# Altium PCB OMC_Unit_200316.PcbDoc
Units mil, origin at the board's own origin, x right, y up, seen from the top; angles counter-clockwise.
Board outline 4842.52 x 2755.91 mil, 2 copper layers (Top Layer, Bottom Layer); 77 components, 66 nets, 353 pads, 384 vias.
Unrouted connection lines stored in the file: 11.
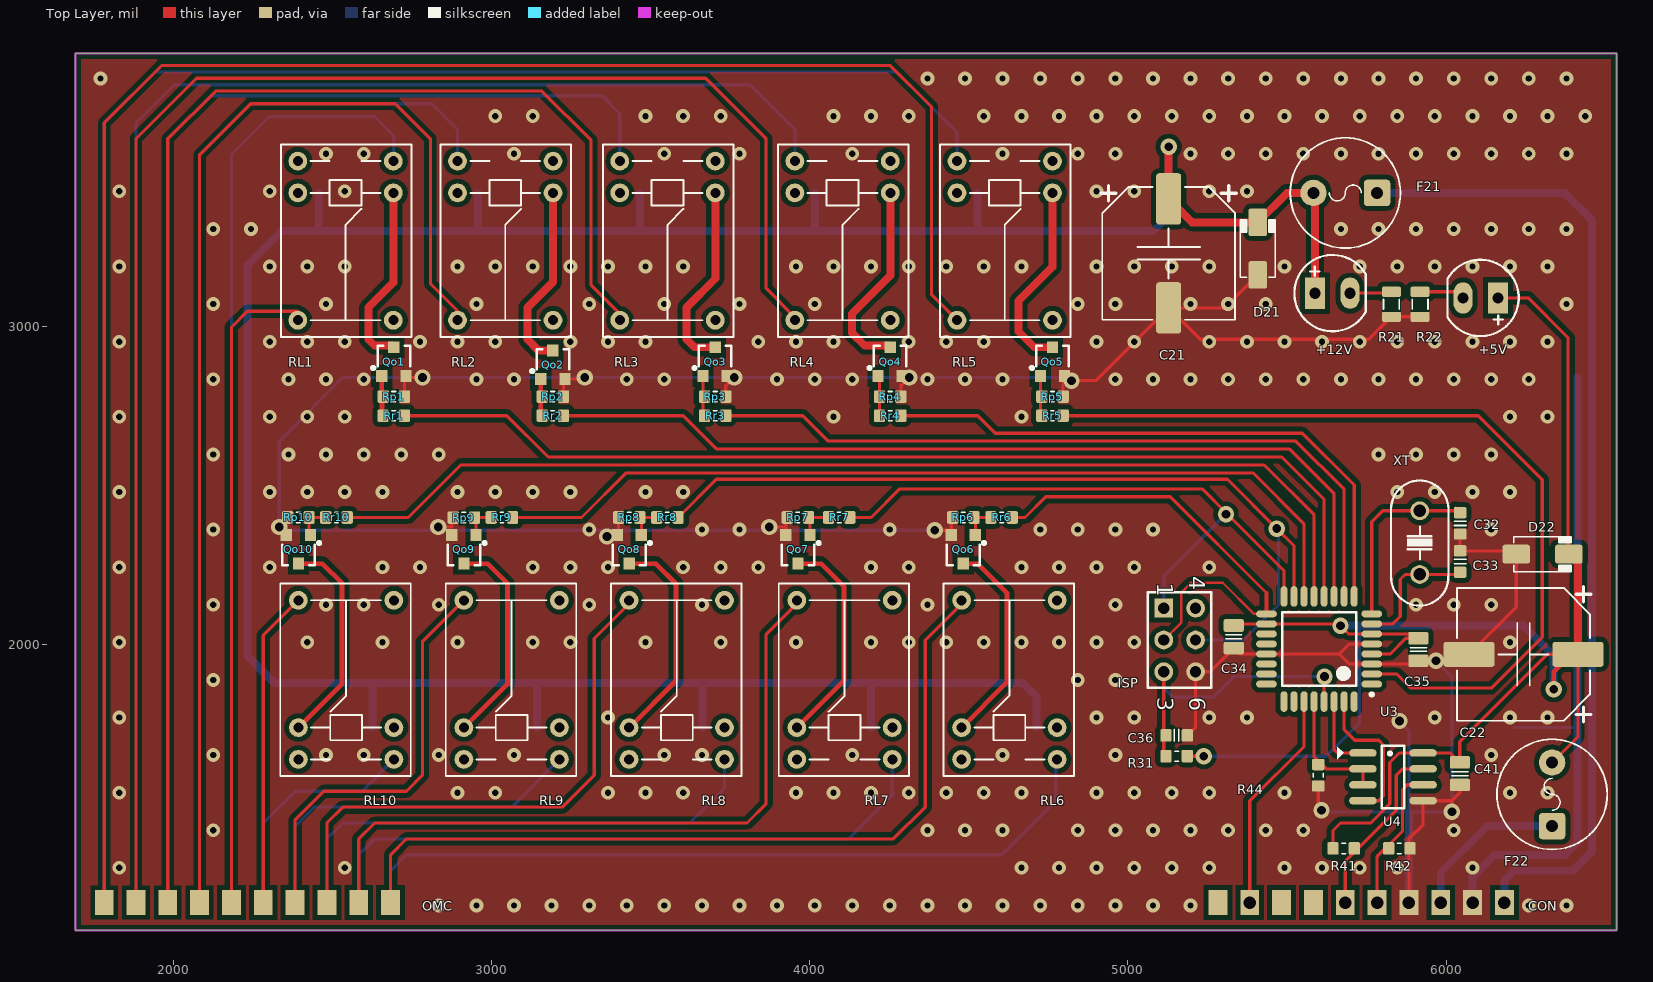
[diagram p0: Top Layer view]
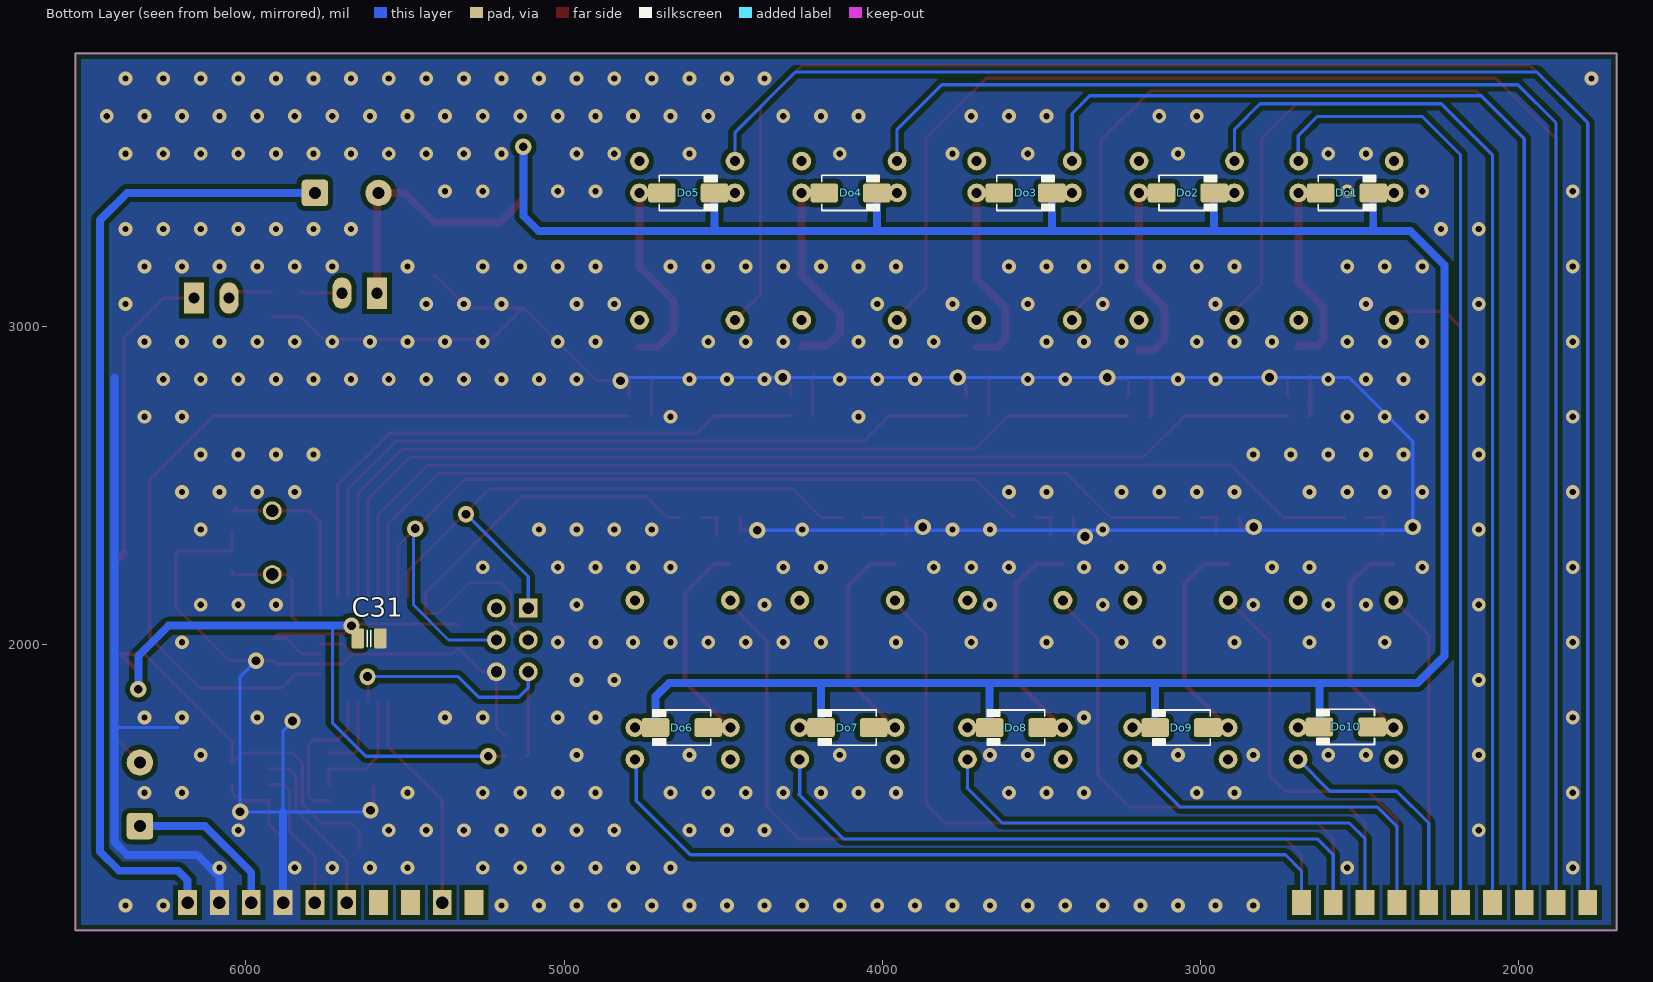
[diagram p1: Bottom Layer view, seen from below]
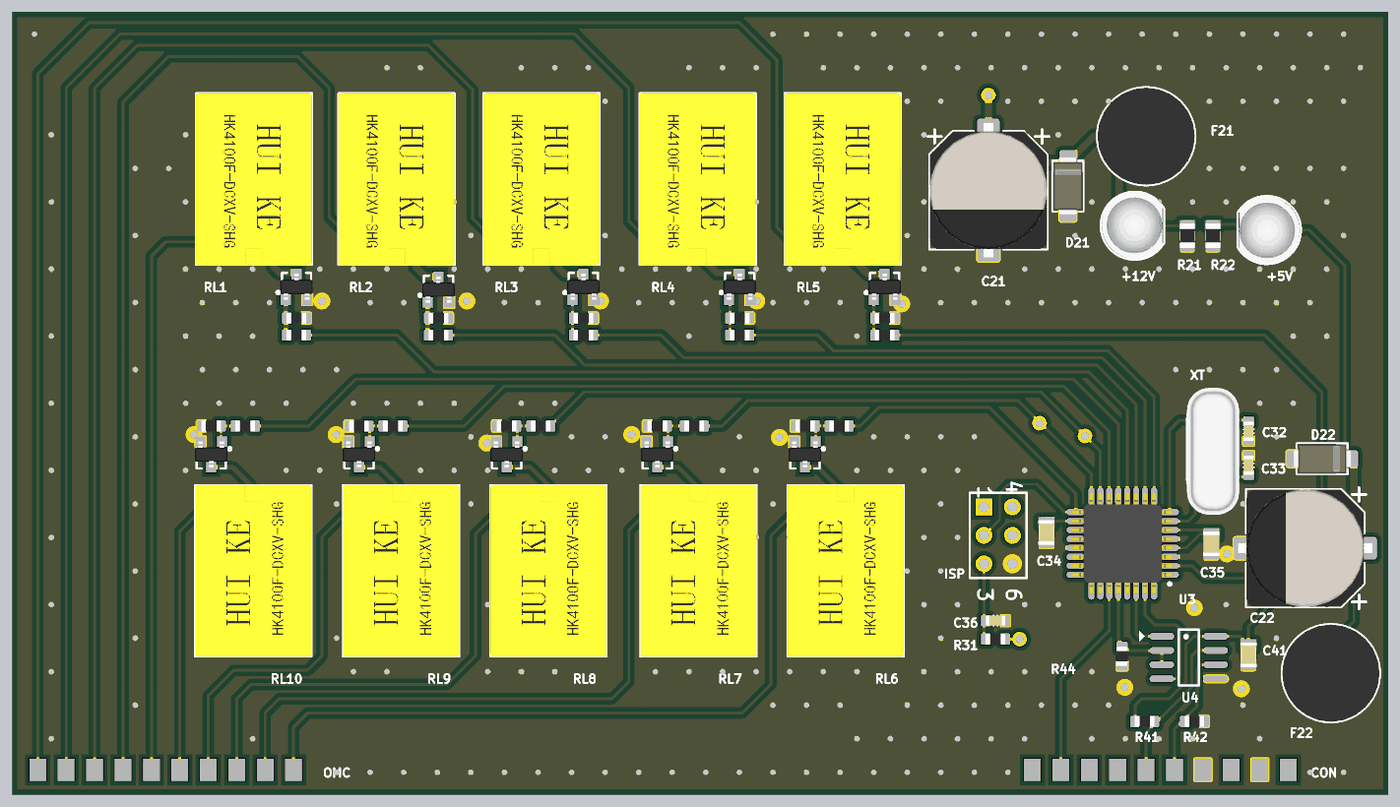
[diagram p2: 3D render of the assembled board from above, using the file's embedded part models]
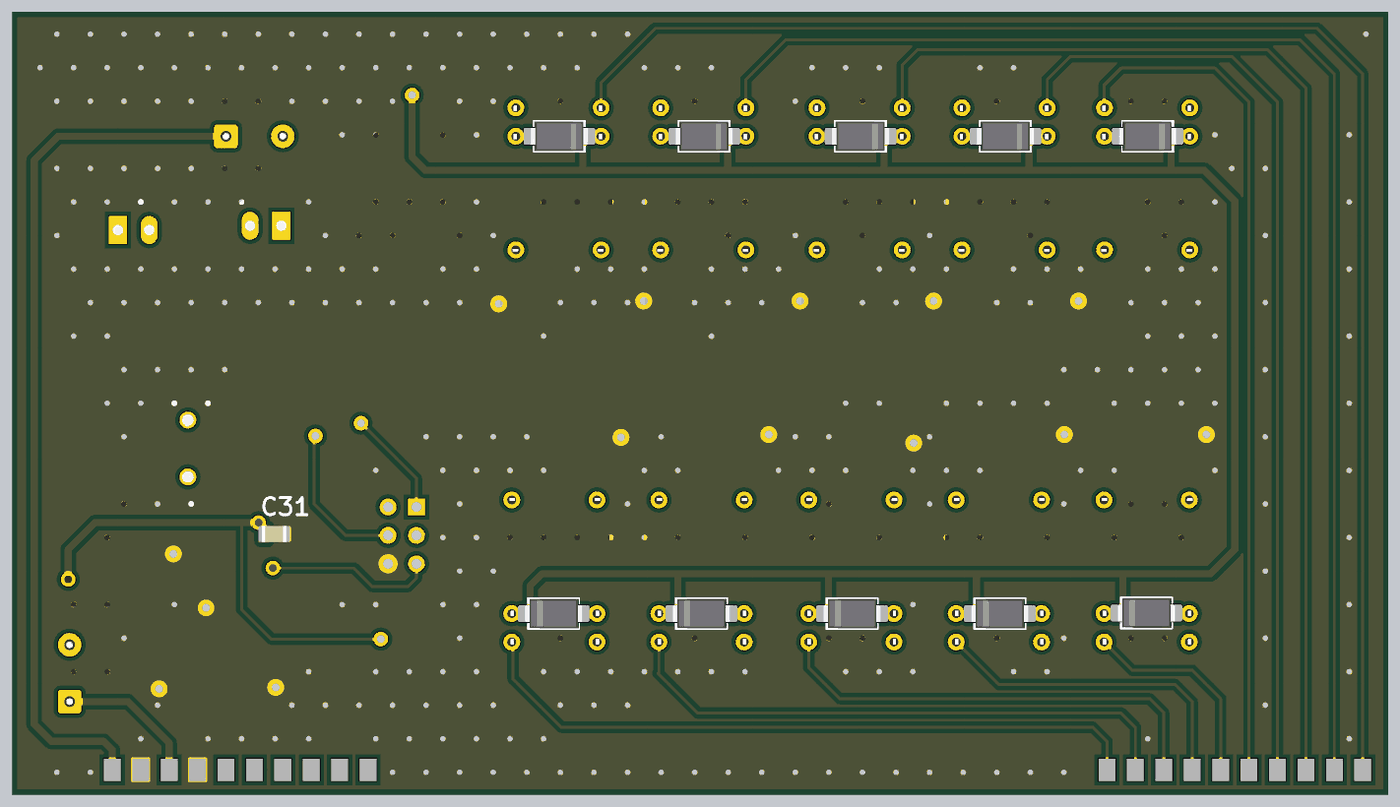
[diagram p3: 3D render of the assembled board from below, using the file's embedded part models]

## Layer stack, top to bottom
Top Solder: solder mask 0.4, Solder Resist, Dk 3.5
Top Layer: signal copper 1.4
Dielectric 1: dielectric 12.6, FR-4, Dk 4.8
Bottom Layer: signal copper 1.4
Bottom Solder: solder mask 0.4, Solder Resist, Dk 3.5

## Board outline
1692.91,1102.36 1692.91,3858.27 6535.43,3858.27 6535.43,1102.36

## Design rules (kind name [scope] priority, off if disabled: settings)
Clearance [All] p1: gap=15
PlaneConnect [All] p1: planeconnectstyle=Direct reliefexpansion=20 reliefentries=4 reliefconductorwidth=25 reliefairgap=10
PolygonConnect [All] p1: connectstyle=Direct reliefconductorwidth=25 reliefentries=4 polygonreliefangle="90 Angle" airgapwidth=10
RoutingVias [All] p1: holewidth=28 width=50 viastyle="Through Hole" minholewidth=23.62 minwidth=47.24 maxholewidth=196.85 maxwidth=196.85
SolderMaskExpansion [All] p1: expansion=4
Width [All] p1: maxlimit=118.11 minlimit=8 preferedwidth=10
29 further rules are at their usual default settings.

## Classes and differential pairs
component class OMC_Unit_200316: D12

## Components (designator, comment, footprint, x,y, rotation, side; value= is the part's Value field where it differs from the comment)
+5V "Led" "LED 5mm RED" 6108.07,3090.16 r180 top
+12V "Led" "LED 5mm RED" 5643.07,3105.16 r0 top
C21 "2200uF/35V" CAP_ELEC_SIZE_G 5128.07,3230.16 r180 top
C22 "2200uF/35V" CAP_ELEC_SIZE_G 6243.07,1970.16 r90 top
C31 "Cap" CAPC2012N_F#1 5613.07,2020.16 r180 bottom
C32 "CAP NP" CAPC1608N 6044.07,2381.91 r270 top
C33 "CAP NP" CAPC1608N 6044.07,2261.91 r90 top
C34 "Cap" CAPC2012N_F#2 5332.68,2025.32 r270 top
C35 "Cap" CAPC2012N_F#2 5912.68,1985.32 r270 top
C36 "CAP NP" CAPC1608N 5153.07,1715.16 r180 top
C41 "100nF/104" CAPC2012N_F#2 6043.07,1595.16 r90 top
CON "Header 10X2A" OMC10 5283.07,1190.16 r0 top
D21 "Diode" DO-214AC 5408.07,3245.16 r90 top
D22 "Diode" DO-214AC 6303.07,2285.16 r0 top
Do1 "M7" DO-214AC 2540,3420 r180 bottom
Do2 "M7" DO-214AC 3040,3420 r180 bottom
Do3 "M7" DO-214AC 3550,3420 r180 bottom
Do4 "M7" DO-214AC 4100,3420 r180 bottom
Do5 "M7" DO-214AC 4610,3420 r180 bottom
Do6 "M7" DO-214AC 4630,1740 r0 bottom
Do7 "M7" DO-214AC 4110,1740 r0 bottom
Do8 "M7" DO-214AC 3580,1740 r0 bottom
Do9 "M7" DO-214AC 3060,1740 r0 bottom
Do10 "M7" DO-214AC 2544,1742 r0 bottom
F21 "1.5A" FUSE_SR-5-BK 5683.07,3420.16 r180 top
F22 "1.5A" FUSE_SR-5-BK 6333.07,1530.16 r90 top
ISP "Header 3X2A" HDR2X3_CEN 5112.68,2115.32 r270 top
OMC "Header 10X2A" OMC10 1783.07,1190.16 r0 top
Qo1 "C828" "SOT23 TOP" 2693.46,2890.16 r0 top
Qo2 "C828" "SOT23 TOP" 3193.07,2880.16 r0 top
Qo3 "C828" "SOT23 TOP" 3703.07,2890.16 r0 top
Qo4 "C828" "SOT23 TOP" 4253.07,2890.16 r0 top
Qo5 "C828" "SOT23 TOP" 4763.07,2890.16 r0 top
Qo6 "C828" "SOT23 TOP" 4482.68,2300 r180 top
Qo7 "C828" "SOT23 TOP" 3963.07,2300 r180 top
Qo8 "C828" "SOT23 TOP" 3433.07,2300 r180 top
Qo9 "C828" "SOT23 TOP" 2913.46,2300 r180 top
Qo10 "C828" "SOT23 TOP" 2393.46,2300 r180 top
R21 "Res_0805_1k" RESC2012N_F 5828.07,3070.16 r270 top
R22 "Res_0805_1k" RESC2012N_F 5918.07,3070.16 r270 top
R31 "Res" RESC1608N_ZERO 5153.07,1650.16 r0 top
R41 "1k" RESC1608N_ZERO 5678.07,1360.16 r180 top
R42 "1k" RESC1608N_ZERO 5853.07,1360.16 r180 top
R44 "330R" RESC1608N_ZERO 5598.07,1590.16 r90 top
RL1 "HK4100F" HK4100F 2691.65,3020.16 r90 top
RL2 "HK4100F" HK4100F 3193.46,3020.16 r90 top
RL3 "HK4100F" HK4100F 3703.46,3020.16 r90 top
RL4 "HK4100F" HK4100F 4253.46,3020.16 r90 top
RL5 "HK4100F" HK4100F 4763.07,3020.16 r90 top
RL6 "HK4100F" HK4100F 4477.55,2140 r270 top
RL7 "HK4100F" HK4100F 3959.68,2140 r270 top
RL8 "HK4100F" HK4100F 3432.44,2140 r270 top
RL9 "HK4100F" HK4100F 2913.46,2140 r270 top
RL10 "HK4100F" HK4100F 2393.46,2140 r270 top
Rp1 "Res" RESC1608N_ZERO 2693.46,2780.16 r180 top
Rp2 "Res" RESC1608N_ZERO 3193.07,2780.16 r180 top
Rp3 "Res" RESC1608N_ZERO 3703.07,2780.16 r180 top
Rp4 "Res" RESC1608N_ZERO 4253.07,2780.16 r180 top
Rp5 "Res" RESC1608N_ZERO 4763.07,2780.16 r180 top
Rp6 "Res" RESC1608N_ZERO 4483.07,2400.16 r0 top
Rp7 "Res" RESC1608N_ZERO 3963.07,2400.16 r0 top
Rp8 "Res" RESC1608N_ZERO 3433.07,2400.16 r0 top
Rp9 "Res" RESC1608N_ZERO 2913.46,2400 r0 top
Rp10 "Res" RESC1608N_ZERO 2393.46,2400.16 r0 top
Rr1 "Res" RESC1608N_ZERO 2693.07,2720.16 r180 top
Rr2 "Res" RESC1608N_ZERO 3193.07,2720.16 r180 top
Rr3 "Res" RESC1608N_ZERO 3703.07,2720.16 r180 top
Rr4 "Res" RESC1608N_ZERO 4253.07,2720.16 r180 top
Rr5 "Res" RESC1608N_ZERO 4763.07,2720.16 r180 top
Rr6 "Res" RESC1608N_ZERO 4603.07,2400.16 r180 top
Rr7 "Res" RESC1608N_ZERO 4093.07,2400.16 r180 top
Rr8 "Res" RESC1608N_ZERO 3553.07,2400.16 r180 top
Rr9 "Res" RESC1608N_ZERO 3033.07,2400.16 r180 top
Rr10 "Res" RESC1608N_ZERO 2513.07,2400.16 r180 top
U3 "ATmega88PA" 32PIN 5600.79,1986.97 r180 top
U4 "MAX485" SO-8 5833.07,1585.16 r0 top
XT "20MHz" XT2 5917.07,2321.16 r90 top

## Footprints (in the part's own frame and the unit in brackets; to place one, negate y for a bottom-side part, rotate by r counter-clockwise, add the part's x,y. Pads: shape width x height; smd on the part's side, far side on the other; paste and mask are expansions set on the pad)
32PIN [mm]
  oval 1.65x0.55 smd: 1(-4.2,2.8) 2(-4.2,2) 3(-4.2,1.2) 4(-4.2,0.4) 5(-4.2,-0.4) 6(-4.2,-1.2) 7(-4.2,-2) 8(-4.2,-2.8) 17(4.2,-2.8) 18(4.2,-2) 19(4.2,-1.2) 20(4.2,-0.4) 21(4.2,0.4) 22(4.2,1.2) 23(4.2,2) 24(4.2,2.8)
  oval 0.55x1.65 smd: 9(-2.8,-4.2) 10(-2,-4.2) 11(-1.2,-4.2) 12(-0.4,-4.2) 13(0.4,-4.2) 14(1.2,-4.2) 15(2,-4.2) 16(2.8,-4.2) 25(2.8,4.2) 26(2,4.2) 27(1.2,4.2) 28(0.4,4.2) 29(-0.4,4.2) 30(-1.2,4.2) 31(-2,4.2) 32(-2.8,4.2)
  silkscreen extent -4.33,-2.95 2.95,3.75, body extent -4.5,-4.5 4.5,4.5, height 1.6
CAP_ELEC_SIZE_G [mm] "Capacitor, polarized, aluminum can; 10.0x10.2mm DxH"
  round 0.635 on Mech14: 0(0,0)
  rrect25% 2x4.1 smd: 1(0,-4.35) 2(0,4.35)
  silkscreen extent -5.4,-5.4 5.4,5.3, body extent -5.25,-6 5.25,6, height 10.5
CAPC1608N [mm] "Chip Capacitor, Body 1.6x0.8mm, 0603, IPC Medium Density"
  round 0.254 on Mech14: 0(0,0)
  rrect25% 0.9x1 smd: 1(-0.85,0) 2(0.85,0)
  Top Layer pour cut-out: -0.4,0.6 0.4,0.6 0.4,-0.6 -0.4,-0.6
  silkscreen extent -0.18,-0.48 0.18,0.48, body extent -0.85,-0.45 0.85,0.45, height 0.89
CAPC2012N_F#1 [mm] "Chip Capacitor, Body 2.0x1.2mm, 0805, IPC Medium Density, for Flex circuits"
  round 0.254 on Mech14: 0(0,0)
  rrect25% 1.2x1.4 on Bottom Solder: 1(-0.9,0) 1(0.9,0)
  rrect25% 1x1.6 smd paste-1: 1(-0.9,0) 2(0.9,0)
  rrect25% 1x1.4 on Bottom Paste: 1(-0.9,0) 1(0.9,0)
  Top Layer pour cut-out: -0.4,0.8 0.4,0.8 0.4,-0.8 -0.4,-0.8
  silkscreen extent -0.15,-0.65 0.15,0.65, body extent -1.1,-0.72 1.1,0.73, height 1.34
CAPC2012N_F#2 [mm] "Chip Capacitor, Body 2.0x1.2mm, 0805, IPC Medium Density, for Flex circuits"
  round 0.254 on Mech14: 0(0,0)
  rrect25% 1.2x1.4 on Top Solder: 1(-0.9,0) 1(0.9,0)
  rrect25% 1x1.6 smd paste-1: 1(-0.9,0) 2(0.9,0)
  rrect25% 1x1.4 on Top Paste: 1(-0.9,0) 1(0.9,0)
  Top Layer pour cut-out: -0.4,0.8 0.4,0.8 0.4,-0.8 -0.4,-0.8
  silkscreen extent -0.15,-0.65 0.15,0.65, body extent -1.1,-0.72 1.1,0.73, height 1.34
DO-214AC [mm] "JEDEC DO214 variation AC. SMA"
  round 0.508 on Mech14: 0(0,0)
  rrect25% 2.2x1.5 smd: A(-2.1,0) K(2.1,0)
  silkscreen extent -2.3,-1.4 2.3,1.4, body extent -2.6,-1.3 2.6,1.3, height 2.42
FUSE_SR-5-BK [mm]
  round 0.5 on Mech14: 0(0,0)
  rrect25% 2.1x2.1 hole 0.965: 1(-2.54,0)
  round 2.1 hole 0.965: 2(2.54,0)
  silkscreen extent -4.4,-4.4 4.4,4.4, body extent -4.35,-4.32 4.35,4.32, height 8.29
HDR2X3_CEN [mm] "Connector; Header; 3x2 Position"
  rect 1.5x1.5 hole 0.9: 1(0,0)
  round 1.5 hole 0.9: 2(2.54,0) 3(5.08,0) 4(0,2.54) 5(2.54,2.54) 6(5.08,2.54)
  silkscreen extent -1.27,-1.27 6.35,3.81
HK4100F [mm] "Relay 6 pin"
  round 1.5 hole 0.8: 1(0,7.62) 2(0,0) 3(10.16,7.62) 4(10.16,0) 5(12.7,7.62) 6(12.7,0)
  silkscreen extent -1.35,-1.45 14.02,8.97, body extent -1.38,-1.43 14.02,8.97, height 11.82
"LED 5mm RED" [mm]
  rect 1.6x2.5 hole 0.9: A(-1.397,0)
  oval 1.5x2.5 hole 0.9: K(1.397,0)
  silkscreen extent -3.04,-3.05 2.64,3.04, body extent -2.94,-2.97 2.48,3.05, height 12.31
OMC10 [mm]
  rect 1.5x2 smd: 1(0,0) 2(2.54,0) 3(5.08,0) 4(7.62,0) 5(10.16,0) 6(12.7,0) 7(15.24,0) 8(17.78,0) 9(20.32,0) 10(22.86,0)
  rect 1.5x2 smd far side: 11(0,0) 12(2.54,0) 13(5.08,0) 14(7.62,0) 15(10.16,0) 16(12.7,0) 17(15.24,0) 18(17.78,0) 19(20.32,0) 20(22.86,0)
RESC1608N_ZERO [mm] "Chip Resistor, Body 1.6x0.8mm, 0603, IPC Medium Density"
  round 0.254 on Mech14: 0(0,0)
  rrect25% 0.9x1 smd: 1(-0.85,0) 2(0.85,0)
  Top Layer pour cut-out: -0.4,0.6 0.4,0.6 0.4,-0.6 -0.4,-0.6
  silkscreen extent -0.15,-0.41 0.15,0.41, body extent -0.87,-0.47 0.88,0.48, height 0.54
RESC2012N_F [mm] "Chip Resistor, Body 2.0x1.2mm, 0805, IPC Medium Density"
  round 0.254 on Mech14: 0(0,0)
  rrect25% 1x1.3 on Top Solder: 1(-1,0) 1(1,0)
  rrect25% 0.8x1.5 smd paste-1: 1(-1,0) 2(1,0)
  rrect25% 0.8x1.3 on Top Paste: 1(-1,0) 1(1,0)
  Top Layer pour cut-out: -0.6,0.75 0.6,0.75 0.6,-0.75 -0.6,-0.75
  silkscreen extent -0.38,-0.64 0.38,0.64, body extent -1.1,-0.67 1.1,0.68, height 0.69
SO-8 [mm] "8-Pin Small Outline Integrated Circuit 1.27 mm Pitch, IPC Medium Density"
  oval 2.2x0.6 smd: 1(-2.4,1.905) 2(-2.4,0.635) 3(-2.4,-0.635) 4(-2.4,-1.905) 5(2.4,-1.905) 6(2.4,-0.635) 7(2.4,0.635) 8(2.4,1.905)
  silkscreen extent -4.44,-2.5 0.9,2.5, body extent -1.95,-2.45 1.95,2.45, height 1.75
"SOT23 TOP" [mm]
  rect 0.9x0.95 smd: 1(-0.965,-1.143) 2(0,1.143) 3(0.965,-1.143)
  silkscreen extent -1.77,-0.63 1.3,1.25, body extent -1.46,-1.17 1.46,1.17, height 1
XT2 [mm]
  round 1.5 hole 1: 1(-2.54,0) 2(2.54,0)
  silkscreen extent -5.03,-2.29 4.96,2.29, body extent -5.93,-2.36 5.42,2.29, height 3.5

## Part data
C21 C22: library part CP4, "Cap 1000uF/16V - 220uF/50V"
C41: library part "CAP NP"
CON OMC: "Header, 10-Pin, Dual row"
Do1 Do2 Do3 Do4 Do5 Do6 Do7 Do8 Do9 Do10: library part Diode
F21 F22: library part Fuse
ISP: "Header, 3-Pin, Dual row"
Qo1 Qo2 Qo3 Qo4 Qo5 Qo6 Qo7 Qo8 Qo9 Qo10: library part NPN, "Transistor C828 C1815...."
R21 R22: library part Res
R41 R42 R44: library part Res, "Tro dan"
U3: library part ATmega48/168/328, "ATmega48/168/328"
U4: "RS232 - RS485 (Same sn75176)"
XT: library part Crystal

## Via types
v1: diameter 43.31, hole 19.68, Top Layer to Bottom Layer, tented both sides, 356 vias
v2: diameter 51.18, hole 27.56, Top Layer to Bottom Layer, 20 vias
v3: diameter 59.06, hole 39.37, Top Layer to Bottom Layer, 7 vias
v4: diameter 50, hole 28, Top Layer to Bottom Layer, 1 vias

## Nets (pads, with @x,y where several pads share a name; then routed paths per layer and width w, separated by ;. In a path a pad name is that pad's centre, name@x,y a point inside that pad or via, vN(x,y) a via of type N, cw(c..) or ccw(c..) an arc to the next point about the centre after c; other vN are vias at no path point)
+5V_IN: CON.8 CON.18 F22.1 | length 505.1
  Bottom Layer w25: v3(5983.07,1190.16) 5983.07,1285.16 6128.07,1430.16 F22.1
+12V: +12V.A C21.1 D21.K Do1.K Do2.K Do3.K Do4.K Do5.K Do6.K Do7.K Do8.K Do9.K Do10.K F21.2 RL1.3 RL2.3 RL3.3 RL4.3 RL5.3 RL6.3 RL7.3 RL8.3 RL9.3 RL10.3 | length 9212.4
  Top Layer w25: RL4.3@3953.46,3430 RL4.3@3958.39,3425.08 ; v2(5128.07,3565.16) C21.1 5201.65,3327.83 D21.K 5500.39,3420.16 F21.2 5588.07,3415.16 +12V.A
  Bottom Layer w25: 2457.32,3302.68 Do1.K ; Do10.K 2626.68,1873.48 ; 2957.32,3302.68 Do2.K ; Do9.K 3142.68,1877.48 ; RL3.3@3388.07,3420.16 RL3.3 ; 3467.32,3302.68 Do3.K ; Do8.K 3662.68,1877.48 ; RL8.3@3732.44,1729.37 RL8.3 ; RL4.3@3953.46,3410.55 RL4.3 ; 4017.32,3302.68 Do4.K ; Do7.K 4192.68,1877.48 ; RL7.3@4259.68,1729.37 RL7.3 ; 4527.32,3312.68 Do5.K ; Do6.K 4712.68,1837.32 4669.84,1880.16 2318.07,1880.16 2233.07,1965.16 2233.07,3193.07 2340,3300 5080,3300 5128.07,3348.07 v2(5128.07,3565.16)
+12V_IN: CON.10 CON.20 F21.1 | length 3077.5
  Bottom Layer w25: F21.1 6373.07,3420.16 6458.07,3335.16 6458.07,1350.16 6398.07,1290.16 6213.07,1290.16 6183.07,1260.16 v3(6183.07,1190.16)
COM1: OMC.5 RL1.1 RL1.2 | length 2037.6
  Top Layer w10: OMC.5 2183.07,2998.5 2233.07,3048.5 RL1.1@2391.65,3048.5
COM2: OMC.4 RL2.1 RL2.2 | length 3762.4
  Top Layer w10: OMC.4 2083.07,3540.16 2243.07,3700.16 2698.07,3700.16 2808.07,3590.16 2808.07,3135.39 2893.46,3050
COM3: OMC.3 RL3.1 RL3.2 | length 4438.9
  Top Layer w10: OMC.3 1983.07,3590.16 2133.07,3740.16 3158.07,3740.16 3313.07,3585.16 3313.07,3130.39 RL3.1@3403.46,3040
COM4: OMC.2 RL4.1 RL4.2 | length 5135
  Top Layer w10: OMC.2 1883.07,3590.16 2073.07,3780.16 3673.07,3780.16 3863.07,3590.16 3863.07,3120.39 RL4.1@3953.46,3030
COM5: OMC.1 RL5.1 RL5.2 | length 5881.9
  Top Layer w10: OMC.1 1783.07,3640.16 1963.07,3820.16 4253.07,3820.16 4383.07,3690.16 4383.07,3100.39 RL5.1@4463.46,3020
COM6: OMC.10 RL6.1 RL6.2 | length 2588.8
  Top Layer w10: OMC.10@2683.07,1180.16 OMC.10 2683.07,1340.16 2733.07,1390.16 4263.07,1390.16 4363.07,1490.16 4363.07,2014.89 RL6.2@4477.55,2129.37
COM7: OMC.9 RL7.1 RL7.2 | length 2204.8
  Top Layer w10: OMC.9@2583.07,1180.16 OMC.9 2583.07,1390.16 2633.07,1440.16 3803.07,1440.16 3863.07,1500.16 3863.07,2032.76 RL7.2@3959.68,2129.37
COM8: OMC.8 RL8.1 RL8.2 | length 1746.6
  Top Layer w10: OMC.8@2483.07,1180.16 OMC.8 2483.07,1440.16 2533.07,1490.16 3223.07,1490.16 3323.07,1590.16 3323.07,2020 RL8.2@3432.44,2129.37
COM9: OMC.7 RL9.1 RL9.2 | length 1331.8
  Top Layer w10: OMC.7@2383.07,1180.16 OMC.7 2383.07,1450.16 2473.07,1540.16 2733.07,1540.16 2783.07,1590.16 2783.07,2009.61 RL9.2
COM10: OMC.6 RL10.1 RL10.2 | length 1030
  Top Layer w10: OMC.6@2283.07,1180.16 OMC.6 2283.07,2029.61 RL10.2 RL10.2@2393.46,2115.55
GND: C21.2 C22.2 C31.2 C32.2 C33.2 C34.2 C35.2 C36.1 C41.1@6043.07,1559.72 CON.7 CON.9 CON.17 CON.19 D21.A D22.A ISP.6 Qo1.3 Qo2.3 Qo3.3 Qo4.3 Qo5.3 Qo6.3 Qo7.3 Qo8.3 Qo9.3 Qo10.3 R21.2 R22.2 R42.1 R44.1 Rp1.1 Rp2.1 Rp3.1 Rp4.1 Rp5.1 Rp6.1 Rp7.1 Rp8.1 Rp9.1 Rp10.1 U3.3 U3.5 U3.21 U4.5 | length 13356.5
  Top Layer w10: Rp1.1 Qo1.3@2726.93,2840.16 ; Qo1.3@2726.93,2846.3 Qo1.3@2726.93,2840.16 ; v2(2783.07,2840.16) Qo1.3@2726.93,2840.16 ; v2(2833.07,2370.16) v2(2833.07,2370.16) 2875.46,2370.23 2875.46,2395.46 Rp9.1 ; Rp2.1 3226.54,2830.62 Qo2.3 3288.07,2835.16 v2(3293.07,2840.16) ; Qo8.3 3399.61,2349.54 Rp8.1 ; Rp3.1 3736.54,2813.62 v2(3763.07,2840.16) ; v2(3873.07,2370.16) 3873.22,2370.31 3925.07,2370.31 ; Qo7.3 3925.07,2370.31 ; Rp7.1 3925.07,2395.62 3925.07,2370.31 ; Rp4.1 4286.54,2813.62 v2(4313.07,2840.16) ; v2(4393.07,2360.16) 4439.75,2360.16 4444.68,2355.23 4444.68,2395.23 Rp6.1 ; Rp5.1 4796.54,2840.62 Qo5.3 ; v2(4823.07,2830.16) 4899.33,2830.16 C21.2 ; C36.1 5212.68,1741.3 ISP.6 5258.11,1915.32 C34.2 5351.34,1971.22 U3.21 5664.13,1971.22 ; D21.A 5304.49,3058.9 C21.2 ; R44.1 5598.07,1490.16 v2(5608.07,1480.16) ; U3.5 5695.63,2002.72 5664.13,1971.22 ; v3(5883.07,1190.16) 5883.07,1390.16 5927.56,1434.65 U4.5 6018.07,1510.16 ; R22.2 R21.2 5757.44,2960.16 5226.81,2960.16 C21.2 ; v2(6018.07,1475.16) 6018.07,1510.16 ; C41.1@6043.07,1559.72 6043.07,1535.16 6018.07,1510.16 ; C32.2 C33.2 6210.18,2295.37 D22.A 6220.39,2118.74 C22.2 6051.54,1949.88 v2(5968.07,1949.88) C35.2 5902.52,1939.72 U3.3 5695.63,1939.72 5664.13,1971.22
  Bottom Layer w10: v2(4393.07,2360.16) 3363.07,2360.16 2343.07,2360.16 v2(2333.07,2370.16) 2333.07,2640.16 2533.07,2840.16 v2(2783.07,2840.16) 3070.87,2840.16 v2(3293.07,2840.16) v2(3763.07,2840.16) v2(4313.07,2840.16) 4813.07,2840.16 v2(4823.07,2830.16) ; v2(5608.07,1480.16) 5613.07,1475.16 5883.07,1475.16 ; v4(5853.07,1760.16) 5883.07,1730.16 5883.07,1475.16 ; v2(5968.07,1949.88) 6018.07,1899.88 v2(6018.07,1475.16) 5883.07,1475.16 ; 6213.07,1740.16 6413.07,1740.16
  Bottom Layer w25: v3(5883.07,1190.16) 5883.07,1475.16 ; v3(6083.07,1190.16) 6083.07,1270.16 6153.07,1340.16 6373.07,1340.16 6413.07,1380.16 6413.07,1740.16 6413.07,2840.16
  other v1: 2834.64,1181.1 2952.76,1181.1 3070.87,1181.1 3188.98,1181.1 3307.09,1181.1 3425.2,1181.1 3543.31,1181.1 3661.42,1181.1 3779.53,1181.1 3897.64,1181.1 4015.75,1181.1 4133.86,1181.1 4251.97,1181.1 4370.08,1181.1 4488.19,1181.1 4606.3,1181.1 4724.41,1181.1 4842.52,1181.1 4960.63,1181.1 5078.74,1181.1 5196.85,1181.1 6259.84,1181.1 6377.95,1181.1 1830.71,1299.21 2539.37,1299.21 4665.35,1299.21 4783.46,1299.21 4901.57,1299.21 5019.68,1299.21 5137.79,1299.21 5255.9,1299.21 5492.12,1299.21 5610.23,1299.21 5728.34,1299.21 5846.45,1299.21 6082.68,1299.21 2125.98,1417.32 4370.08,1417.32 4488.19,1417.32 4606.3,1417.32 4842.52,1417.32 4960.63,1417.32 5078.74,1417.32 5196.85,1417.32 5314.96,1417.32 5433.07,1417.32 5551.18,1417.32 6023.62,1417.32 1830.71,1535.43 2893.7,1535.43 3011.81,1535.43 3366.14,1535.43 3484.25,1535.43 3602.36,1535.43 3956.69,1535.43 4074.8,1535.43 4192.91,1535.43 4311.02,1535.43 4429.13,1535.43 4547.24,1535.43 4665.35,1535.43 4901.57,1535.43 5019.68,1535.43 5137.79,1535.43 5255.9,1535.43 5492.12,1535.43 6200.79,1535.43 6318.9,1535.43 2125.98,1653.54 2480.31,1653.54 2598.42,1653.54 2834.64,1653.54 3070.87,1653.54 3543.31,1653.54 3661.42,1653.54 4133.86,1653.54 4606.3,1653.54 4960.63,1653.54 6141.73,1653.54 1830.71,1771.65 3366.14,1771.65 4901.57,1771.65 5019.68,1771.65 5255.9,1771.65 5374.01,1771.65 5964.57,1771.65 6200.79,1771.65 6318.9,1771.65 2125.98,1889.76 4842.52,1889.76 4960.63,1889.76 1830.71,2007.87 2421.26,2007.87 2657.48,2007.87 2893.7,2007.87 3129.92,2007.87 3248.03,2007.87 3484.25,2007.87 3720.47,2007.87 3956.69,2007.87 4192.91,2007.87 4311.02,2007.87 4429.13,2007.87 4547.24,2007.87 4665.35,2007.87 4783.46,2007.87 4901.57,2007.87 5019.68,2007.87 6200.79,2007.87 2125.98,2125.98 2480.31,2125.98 2598.42,2125.98 2834.64,2125.98 3307.09,2125.98 3661.42,2125.98 4370.08,2125.98 4960.63,2125.98 5905.51,2125.98 6023.62,2125.98 6141.73,2125.98 1830.71,2244.09 2303.15,2244.09 2657.48,2244.09 2775.59,2244.09 3129.92,2244.09 3248.03,2244.09 3366.14,2244.09 3602.36,2244.09 3720.47,2244.09 3838.58,2244.09 4192.91,2244.09 4311.02,2244.09 4665.35,2244.09 4783.46,2244.09 4901.57,2244.09 5019.68,2244.09 5255.9,2244.09 2125.98,2362.2 3307.09,2362.2 3661.42,2362.2 3779.53,2362.2 4251.97,2362.2 4724.41,2362.2 4842.52,2362.2 4960.63,2362.2 5078.74,2362.2 6141.73,2362.2 1830.71,2480.31 2303.15,2480.31 2421.26,2480.31 2539.37,2480.31 2657.48,2480.31 2893.7,2480.31 3011.81,2480.31 3129.92,2480.31 3248.03,2480.31 3484.25,2480.31 3602.36,2480.31 5846.45,2480.31 5964.57,2480.31 6082.68,2480.31 6200.79,2480.31 2125.98,2598.42 2362.2,2598.42 2480.31,2598.42 2598.42,2598.42 2716.53,2598.42 2834.64,2598.42 5787.4,2598.42 5905.51,2598.42 6023.62,2598.42 6141.73,2598.42 1830.71,2716.53 2303.15,2716.53 2421.26,2716.53 2539.37,2716.53 4074.8,2716.53 4665.35,2716.53 6200.79,2716.53 6318.9,2716.53 2125.98,2834.64 2362.2,2834.64 2480.31,2834.64 2598.42,2834.64 2952.76,2834.64 3070.87,2834.64 3425.2,2834.64 3543.31,2834.64 3897.64,2834.64 4015.75,2834.64 4133.86,2834.64 4370.08,2834.64 4488.19,2834.64 4606.3,2834.64 4960.63,2834.64 5078.74,2834.64 5196.85,2834.64 5314.96,2834.64 5433.07,2834.64 5551.18,2834.64 5669.29,2834.64 5787.4,2834.64 5905.51,2834.64 6023.62,2834.64 6141.73,2834.64 6259.84,2834.64 1830.71,2952.76 2303.15,2952.76 2421.26,2952.76 2539.37,2952.76 2775.59,2952.76 2893.7,2952.76 3011.81,2952.76 3248.03,2952.76 3366.14,2952.76 3484.25,2952.76 3838.58,2952.76 3956.69,2952.76 4074.8,2952.76 4311.02,2952.76 4429.13,2952.76 4547.24,2952.76 4901.57,2952.76 5019.68,2952.76 5255.9,2952.76 5374.01,2952.76 5492.12,2952.76 5610.23,2952.76 5728.34,2952.76 5846.45,2952.76 5964.57,2952.76 6082.68,2952.76 6200.79,2952.76 6318.9,2952.76 2125.98,3070.87 2480.31,3070.87 2952.76,3070.87 3307.09,3070.87 3543.31,3070.87 3779.53,3070.87 4015.75,3070.87 4842.52,3070.87 4960.63,3070.87 5196.85,3070.87 5314.96,3070.87 5433.07,3070.87 6377.95,3070.87 1830.71,3188.98 2303.15,3188.98 2421.26,3188.98 2539.37,3188.98 2893.7,3188.98 3011.81,3188.98 3129.92,3188.98 3248.03,3188.98 3366.14,3188.98 3484.25,3188.98 3602.36,3188.98 3956.69,3188.98 4074.8,3188.98 4192.91,3188.98 4311.02,3188.98 4429.13,3188.98 4547.24,3188.98 4665.35,3188.98 4901.57,3188.98 5019.68,3188.98 5137.79,3188.98 5255.9,3188.98 5492.12,3188.98 5728.34,3188.98 5846.45,3188.98 5964.57,3188.98 6082.68,3188.98 6200.79,3188.98 6318.9,3188.98 2125.98,3307.09 2244.09,3307.09 5669.29,3307.09 5787.4,3307.09 5905.51,3307.09 6023.62,3307.09 6141.73,3307.09 6259.84,3307.09 6377.95,3307.09 1830.71,3425.2 2303.15,3425.2 2539.37,3425.2 4901.57,3425.2 5019.68,3425.2 5255.9,3425.2 5374.01,3425.2 2480.31,3543.31 2598.42,3543.31 3070.87,3543.31 3543.31,3543.31 3779.53,3543.31 4133.86,3543.31 4606.3,3543.31 4842.52,3543.31 4960.63,3543.31 5196.85,3543.31 5314.96,3543.31 5433.07,3543.31 5551.18,3543.31 5669.29,3543.31 5787.4,3543.31 5905.51,3543.31 6023.62,3543.31 6141.73,3543.31 6259.84,3543.31 6377.95,3543.31 3011.81,3661.42 3129.92,3661.42 3484.25,3661.42 3602.36,3661.42 3720.47,3661.42 4074.8,3661.42 4192.91,3661.42 4311.02,3661.42 4547.24,3661.42 4665.35,3661.42 4783.46,3661.42 4901.57,3661.42 5019.68,3661.42 5137.79,3661.42 5255.9,3661.42 5374.01,3661.42 5492.12,3661.42 5610.23,3661.42 5728.34,3661.42 5846.45,3661.42 5964.57,3661.42 6082.68,3661.42 6200.79,3661.42 6318.9,3661.42 6437.01,3661.42 1771.65,3779.53 4370.08,3779.53 4488.19,3779.53 4606.3,3779.53 4724.41,3779.53 4842.52,3779.53 4960.63,3779.53 5078.74,3779.53 5196.85,3779.53 5314.96,3779.53 5433.07,3779.53 5551.18,3779.53 5669.29,3779.53 5787.4,3779.53 5905.51,3779.53 6023.62,3779.53 6141.73,3779.53 6259.84,3779.53 6377.95,3779.53
  other v2: 3363.07,2340.16
IDC: CON.2 CON.12 U3.27 | length 702.1
  Top Layer w10: v3(5383.07,1190.16) 5383.07,1510.16 5553.54,1680.63 U3.27
MCU_RX: U3.30 U4.1 | length 246
  Top Layer w10: U3.30 5648.03,1670.47 5658.35,1660.16 U4.1
MCU_TX: U3.31 U4.4 | length 462.3
  Top Layer w10: U3.31 5679.53,1733.7 5713.07,1700.16 5788.07,1700.16 5803.07,1685.16 5803.07,1525.16 5788.07,1510.16 U4.4
MISO: ISP.1 Rr7.1 U3.16 | length 1967.6
  Top Layer w10: Rr7.1 4193.07,2400.16 4283.07,2490.16 5233.07,2490.16 v2@5310.57,2412.66 ; v2(5308.07,2410.16) v2@5310.57,2412.66 ; U3.16 5490.55,2232.68 v2@5310.57,2412.66
  Bottom Layer w10: ISP.1 5112.68,2214.76 v2(5308.07,2410.16)
MOSI: ISP.5 Rr8.1 U3.15 | length 2778.6
  Top Layer w10: Rr8.1 3706.54,2520.16 5313.07,2520.16 v2(5468.07,2365.16) 5522.05,2311.18 U3.15
  Bottom Layer w10: ISP.5 5363.23,2015.32 5473.07,2125.16 5473.07,2360.16 v2(5468.07,2365.16)
NC1: OMC.15 RL1.6 | length 3025.1
  Bottom Layer w10: OMC.15@2183.07,1180.16 OMC.15 2183.07,3540.16 2303.07,3660.16 2633.07,3660.16 2693.07,3600.16 2693.07,3521.57 RL1.6
Net+5V_2: +5V.K R22.1@5918.07,3109.53 | length 143
  Top Layer w10: R22.1@5918.07,3109.53 6033.7,3109.53 +5V.K
Net+12V_2: +12V.K R21.1@5828.07,3109.53 | length 131.8
  Top Layer w10: +12V.K 5823.7,3105.16 R21.1@5828.07,3109.53
NetDo1_1: Do1.A Qo1.2 RL1.4 | length 583.3
  Top Layer w25: RL1.4 2691.65,3138.74 2613.07,3060.16 2613.07,2960.16 2633.07,2940.16 2688.46,2940.16 Qo1.2
NetDo2_1: Do2.A Qo2.2 RL2.4 | length 587.8
  Top Layer w25: Qo2.2 3148.07,2925.16 3113.07,2960.16 3113.07,3060.16 3193.07,3140.16 3193.07,3419.76 RL2.4
NetDo3_1: Do3.A Qo3.2 RL3.4 | length 597.8
  Top Layer w25: Qo3.2 3638.07,2935.16 3613.07,2960.16 3613.07,3060.16 3703.46,3150.55 RL3.4
NetDo4_1: Do4.A Qo4.2 RL4.4 | length 635.5
  Top Layer w25: RL4.4@4248.54,3425.08 RL4.4 4253.46,3160.55 4133.07,3040.16 4133.07,2980.16 4173.07,2940.16 4248.07,2940.16 Qo4.2
NetDo5_1: Do5.A Qo5.2 RL5.4 | length 607.5
  Top Layer w25: Qo5.2 4705.75,2935.16 4655.75,2985.16 4655.75,3080.16 4763.46,3187.87 RL5.4@4763.46,3420
NetDo6_1: Do6.A Qo6.2 RL6.4 | length 665
  Top Layer w10: RL6.4@4477.55,1729.37 RL6.4@4482.87,1734.68
  Top Layer w15: RL6.4 4620,1882.45 4620,2163 4528,2255 Qo6.2
NetDo7_1: Do7.A Qo7.2 RL7.4 | length 686.7
  Top Layer w10: RL7.4@3959.68,1729.37 RL7.4@3964.99,1734.68
  Top Layer w15: RL7.4 4108,1888.32 4108,2183 4036,2255 Qo7.2
NetDo8_1: Do8.A Qo8.2 RL8.4 | length 693.7
  Top Layer w10: RL8.4@3432.44,1729.37 RL8.4@3437.75,1734.68
  Top Layer w15: RL8.4 3580,1887.56 3580,2192 3517,2255 Qo8.2
NetDo9_1: Do9.A Qo9.2 RL9.4 | length 672.3
  Top Layer w15: RL9.4 3050.79,1877.32 3050.79,2192 2987.79,2255 Qo9.2
NetDo10_1: Do10.A Qo10.2 RL10.4 | length 672.9
  Top Layer w15: RL10.4 2530.79,1877.32 2530.79,2193 2468.79,2255 Qo10.2
NetQo1_1: Qo1.1 Rp1.2 Rr1.2 | length 161.7
  Top Layer w10: 2659.61,2745.16 Rp1.2@2659.61,2780.16
  Top Layer w15: Qo1.1 2655.46,2724.3 Rr1.2
NetQo2_1: Qo2.1 Rp2.2 Rr2.2 | length 116.9
  Top Layer w15: Qo2.1 3155.07,2724.69 Rr2.2
NetQo3_1: Qo3.1 Rp3.2 Rr3.2 | length 126.9
  Top Layer w10: Qo3.1 3665.07,2724.69 Rr3.2
NetQo4_1: Qo4.1 Rp4.2 Rr4.2 | length 136.9
  Top Layer w10: Qo4.1@4215.07,2855.16 Qo4.1 4219.61,2840.62 Rp4.2 Rr4.2
NetQo5_1: Qo5.1 Rp5.2 Rr5.2 | length 126.9
  Top Layer w10: Qo5.1 4725.07,2724.69 Rr5.2
NetQo6_1: Qo6.1 Rp6.2 Rr6.2 | length 109.9
  Top Layer w10: Qo6.1 4520.68,2396.02 Rp6.2 Rr6.2
NetQo7_1: Qo7.1 Rp7.2 Rr7.2 | length 120.1
  Top Layer w10: Qo7.1 4001.07,2395.62 Rp7.2 Rr7.2
NetQo8_1: Qo8.1 Rp8.2 Rr8.2 | length 110.1
  Top Layer w10: Qo8.1 3471.07,2395.62 Rp8.2 Rr8.2
NetQo9_1: Qo9.1 Rp9.2 Rr9.2 | length 109.6
  Top Layer w10: Qo9.1 2951.46,2395.46 Rp9.2 2947.09,2400.16 Rr9.2
NetQo10_1: Qo10.1 Rp10.2 Rr10.2 | length 109.7
  Top Layer w10: Qo10.1 2426.93,2349.54 Rp10.2 Rr10.2
NO2: OMC.14 RL2.5 | length 3369.6
  Bottom Layer w10: OMC.14@2083.07,1180.16 OMC.14 2083.07,3540.16 2243.07,3700.16 2813.07,3700.16 2893.07,3620.16 2893.07,3520.55 RL2.5
NO3: OMC.13 RL3.5 | length 4039
  Bottom Layer w10: OMC.13@1983.07,1180.16 OMC.13 1983.07,3590.16 2118.07,3725.16 3348.07,3725.16 3403.46,3669.76 RL3.5@3403.46,3540
NO4: OMC.12 RL4.5 | length 4718
  Bottom Layer w10: OMC.12 1883.07,3640.16 2003.07,3760.16 3813.07,3760.16 3953.46,3619.76 RL4.5@3953.46,3530
NO5: OMC.11 RL5.5 | length 5365.3
  Bottom Layer w10: OMC.11 1783.07,3640.16 1943.07,3800.16 4273.07,3800.16 4463.46,3609.76 RL5.5@4463.46,3520
NO6: OMC.20 RL6.5 | length 2412.2
  Bottom Layer w10: OMC.20@2683.07,1180.16 OMC.20 2683.07,1290.16 2733.07,1340.16 4603.07,1340.16 4773.07,1510.16 4773.07,1624.89 RL6.5@4777.55,1629.37
NO7: OMC.19 RL7.5 | length 2019.3
  Bottom Layer w10: OMC.19@2583.07,1180.16 OMC.19 2583.07,1340.16 2633.07,1390.16 4123.07,1390.16 4263.07,1530.16 4259.68,1533.55 RL7.5@4259.68,1629.37
NO8: OMC.18 RL8.5 | length 1605.7
  Bottom Layer w10: OMC.18@2483.07,1180.16 OMC.18 2483.07,1390.16 2533.07,1440.16 3623.07,1440.16 3733.07,1550.16 3732.44,1550.79 RL8.5@3732.44,1629.37
NO9: OMC.17 RL9.5 | length 1167.3
  Bottom Layer w10: OMC.17@2383.07,1180.16 OMC.17 2383.07,1430.16 2443.07,1490.16 3063.62,1490.16 RL9.5
NO10: OMC.16 RL10.5 | length 753.2
  Bottom Layer w10: OMC.16@2283.07,1180.16 OMC.16 2283.07,1440.16 2383.07,1540.16 2593.62,1540.16 RL10.5
RELAY_1: Rr1.1 U3.12 | length 3303.5
  Top Layer w10: Rr1.1 3048.07,2720.16 3178.07,2590.16 5483.07,2590.16 5616.54,2456.69 U3.12
RELAY_2: Rr2.1 U3.11 | length 2845.8
  Top Layer w10: Rr2.1 3603.07,2720.16 3708.07,2615.16 5508.07,2615.16 5648.03,2475.2 U3.11
RELAY_3: Rr3.1 U3.10 | length 2375.2
  Top Layer w10: Rr3.1 3978.07,2720.16 4058.07,2640.16 5528.07,2640.16 5679.53,2488.7 U3.10
RELAY_4: Rr4.1 U3.9 | length 1864.6
  Top Layer w10: Rr4.1 4528.07,2720.16 4583.07,2665.16 5548.07,2665.16 5711.02,2502.2 U3.9
RELAY_5: Rr5.1 U3.2 | length 2704.3
  Top Layer w10: Rr5.1 6101.07,2720.16 6302.07,2519.16 6302.07,2024.16 6142.07,1864.16 5889.14,1864.16 5845.07,1908.23 U3.2
RELAY_6: ISP.2 Rr6.1 U3.17 | length 1509.8
  Top Layer w8: ISP.2 5168.07,2070.71 5168.07,2165.16 5198.07,2195.16 5298.07,2195.16 5396.02,2097.2 U3.17
  Top Layer w10: Rr6.1 4676.54,2400.16 4741.54,2465.16 5133.07,2465.16 5435.43,2162.8
  Top Layer w12: U3.17 5435.43,2162.8
RELAY_9: Rr9.1 U3.14 | length 2838.8
  Top Layer w10: Rr9.1 3283.07,2400.16 3423.07,2540.16 5393.07,2540.16 5553.07,2380.16 5553.07,2152.8 U3.14
RELAY_10: Rr10.1 U3.13 | length 3427.7
  Top Layer w10: Rr10.1 2738.07,2400.16 2903.07,2565.16 5428.07,2565.16 5585.04,2408.19 U3.13
RS485A: CON.6 CON.16 R42.2 U4.6 | length 458.8
  Top Layer w10: v3(5783.07,1190.16) 5783.07,1335.16 5863.07,1415.16 5863.07,1545.16 5878.07,1560.16 U4.6
RS485B: CON.5 CON.15 R41.1 U4.7 | length 559
  Top Layer w10: v3(5683.07,1190.16) 5683.07,1320.16 5843.07,1480.16 5843.07,1590.16 5863.07,1610.16 U4.7
RS485D: R44.2 U3.28 U4.2 U4.3 | length 392.7
  Top Layer w10: U3.28 5585.04,1648.19 5623.07,1610.16 U4.2 U4.3
RST: C36.2 ISP.3 R31.1 U3.29 | length 941.9
  Top Layer w10: ISP.3 5112.68,1657.09 R31.1 ; U3.29 5616.54,1888.62 5618.07,1890.16 v2(5618.07,1900.16)
  Bottom Layer w10: ISP.3 5112.68,1865.55 5143.07,1835.16 5268.07,1835.16 5333.07,1900.16 v2(5618.07,1900.16)
VCC: +5V.A C22.1 C31.1@5648.5,2020.16 C34.1@5332.68,2060.75 C35.1@5912.68,2020.75 C41.2 D22.K F22.2 ISP.4 R31.2 R41.2 U3.4 U3.6 U3.18 U4.8 | length 5431
  Top Layer w10: R31.2 v2(5238.07,1650.16) ; C34.1@5332.68,2060.75 5337.64,2065.71 U3.18 5662.52,2065.71 v2(5668.07,2060.16) 5694.02,2034.21 U3.6 5899.21,2034.21 5912.68,2020.75 5873.66,2020.75 5824.13,1971.22 U3.4 ; R41.2 5644.61,1416.69 5668.07,1440.16 5763.07,1440.16 5823.07,1500.16 5823.07,1630.16 5853.07,1660.16 U4.8 6013.5,1660.16 C41.2 6043.07,1695.16 6318.07,1970.16 C22.1@6393.07,1970.16 ; +5V.A 6258.07,3090.16 6383.07,2965.16 D22.K@6383.07,2287.83 ; F22.2 6414.33,1711.42 C22.1
  Top Layer w15: v2(6338.07,1860.16) 6338.07,1915.16 C22.1@6393.07,1970.16
  Top Layer w25: D22.K@6383.07,2287.83 D22.K 6414.33,2256.57 C22.1
  Bottom Layer w10: v2(5238.07,1650.16) 5623.07,1650.16 5728.07,1755.16 5728.07,2060.16
  Bottom Layer w25: v2(5668.07,2060.16) 5728.07,2060.16 6243.07,2060.16 6338.07,1965.16 v2(6338.07,1860.16)
XTAL1: C33.1 U3.7 XT.1 | length 413.3
  Top Layer w10: U3.7 5832.62,2065.71 5856.07,2089.16 5856.07,2204.16 5855.07,2205.16 5871.07,2221.16 XT.1 C33.1@6043.06,2221.16 ; C33.1@6042.21,2230.3 C33.1
XTAL2: C32.1 U3.8 XT.2 | length 588.4
  Top Layer w10: U3.8 5766.14,2386.23 5801.07,2421.16 XT.2 C32.1@6029.98,2421.16 ; C32.1@6029.14,2430.3 C32.1
pads on no net: C21.0 C22.0 C31.0 C31.1@5577.64,2020.15 C31.1@5577.64,2020.16 C31.1@5648.5,2020.16 C31.1@5648.51,2020.15 C32.0 C33.0 C34.0 C34.1@5332.67,1989.88 C34.1@5332.67,2060.75 C34.1@5332.68,1989.88 C34.1@5332.68,2060.75 C35.0 C35.1@5912.67,1949.88 C35.1@5912.67,2020.75 C35.1@5912.68,1949.88 C35.1@5912.68,2020.75 C36.0 C41.0 C41.1@6043.07,1559.72 C41.1@6043.07,1630.59 C41.1@6043.08,1559.72 C41.1@6043.08,1630.59 CON.1 CON.3 CON.4 CON.11 CON.13 CON.14 D21.0 D22.0 Do1.0 Do2.0 Do3.0 Do4.0 Do5.0 Do6.0 Do7.0 Do8.0 Do9.0 Do10.0 F21.0 F22.0 R21.0 R21.1@5828.06,3030.79 R21.1@5828.06,3109.53 R21.1@5828.07,3030.79 R21.1@5828.07,3109.53 R22.0 R22.1@5918.06,3030.79 R22.1@5918.06,3109.53 R22.1@5918.07,3030.79 R22.1@5918.07,3109.53 R31.0 R41.0 R42.0 R44.0 RL1.5 RL2.6 RL3.6 RL4.6 RL5.6 RL6.6 RL7.6 RL8.6 RL9.6 RL10.6 Rp1.0 Rp2.0 Rp3.0 Rp4.0 Rp5.0 Rp6.0 Rp7.0 Rp8.0 Rp9.0 Rp10.0 Rr1.0 Rr2.0 Rr3.0 Rr4.0 Rr5.0 Rr6.0 Rr7.0 Rr8.0 Rr9.0 Rr10.0 U3.1 U3.19 U3.20 U3.22 U3.23 U3.24 U3.25 U3.26 U3.32

## Polygon pours and split planes (outlines as drawn)
GND on Top Layer "Top Layer-No Net" (solid, pour order 10): 1692.91,1102.36 6535.43,1102.36 6535.43,3858.27 1692.91,3858.27
GND on Bottom Layer "Top Layer-No Net" (solid, pour order 12): 1692.91,1102.36 6535.43,1102.36 6535.43,3858.27 1692.91,3858.27

## Keep-outs
Keep-Out Layer:
  lines w5.91: 1692.91,1102.36 1692.91,3858.27 2165.35,3858.27 6535.43,3858.27 6535.43,1102.36 1692.91,1102.36

## Dimensions
1574.8,3858.27 to 1535.43,1102.36 on Top Overlay
1692.91,1023.62 to 6535.43,1023.62 on Top Overlay

## Text inside footprints (layer, text, board x,y; h text height)
ISP: Top Overlay "6" at 5192.68,1835.32 h50 r270; Top Overlay "3" at 5092.68,1835.32 h50 r270; Top Overlay "1" at 5092.68,2195.32 h50 r270; Top Overlay "4" at 5192.68,2215.32 h50 r270